# Altium PCB CH32F&Vx0xR-R1-1v2.PcbDoc (part 1 of 2)
Units mil, origin at the board's own origin, x right, y up, seen from the top; angles counter-clockwise.
Board outline 2913.39 x 3372 mil, 2 copper layers (Top Layer, Bottom Layer); 78 components, 107 nets, 422 pads, 593 vias.
Unrouted connection lines stored in the file: 10.
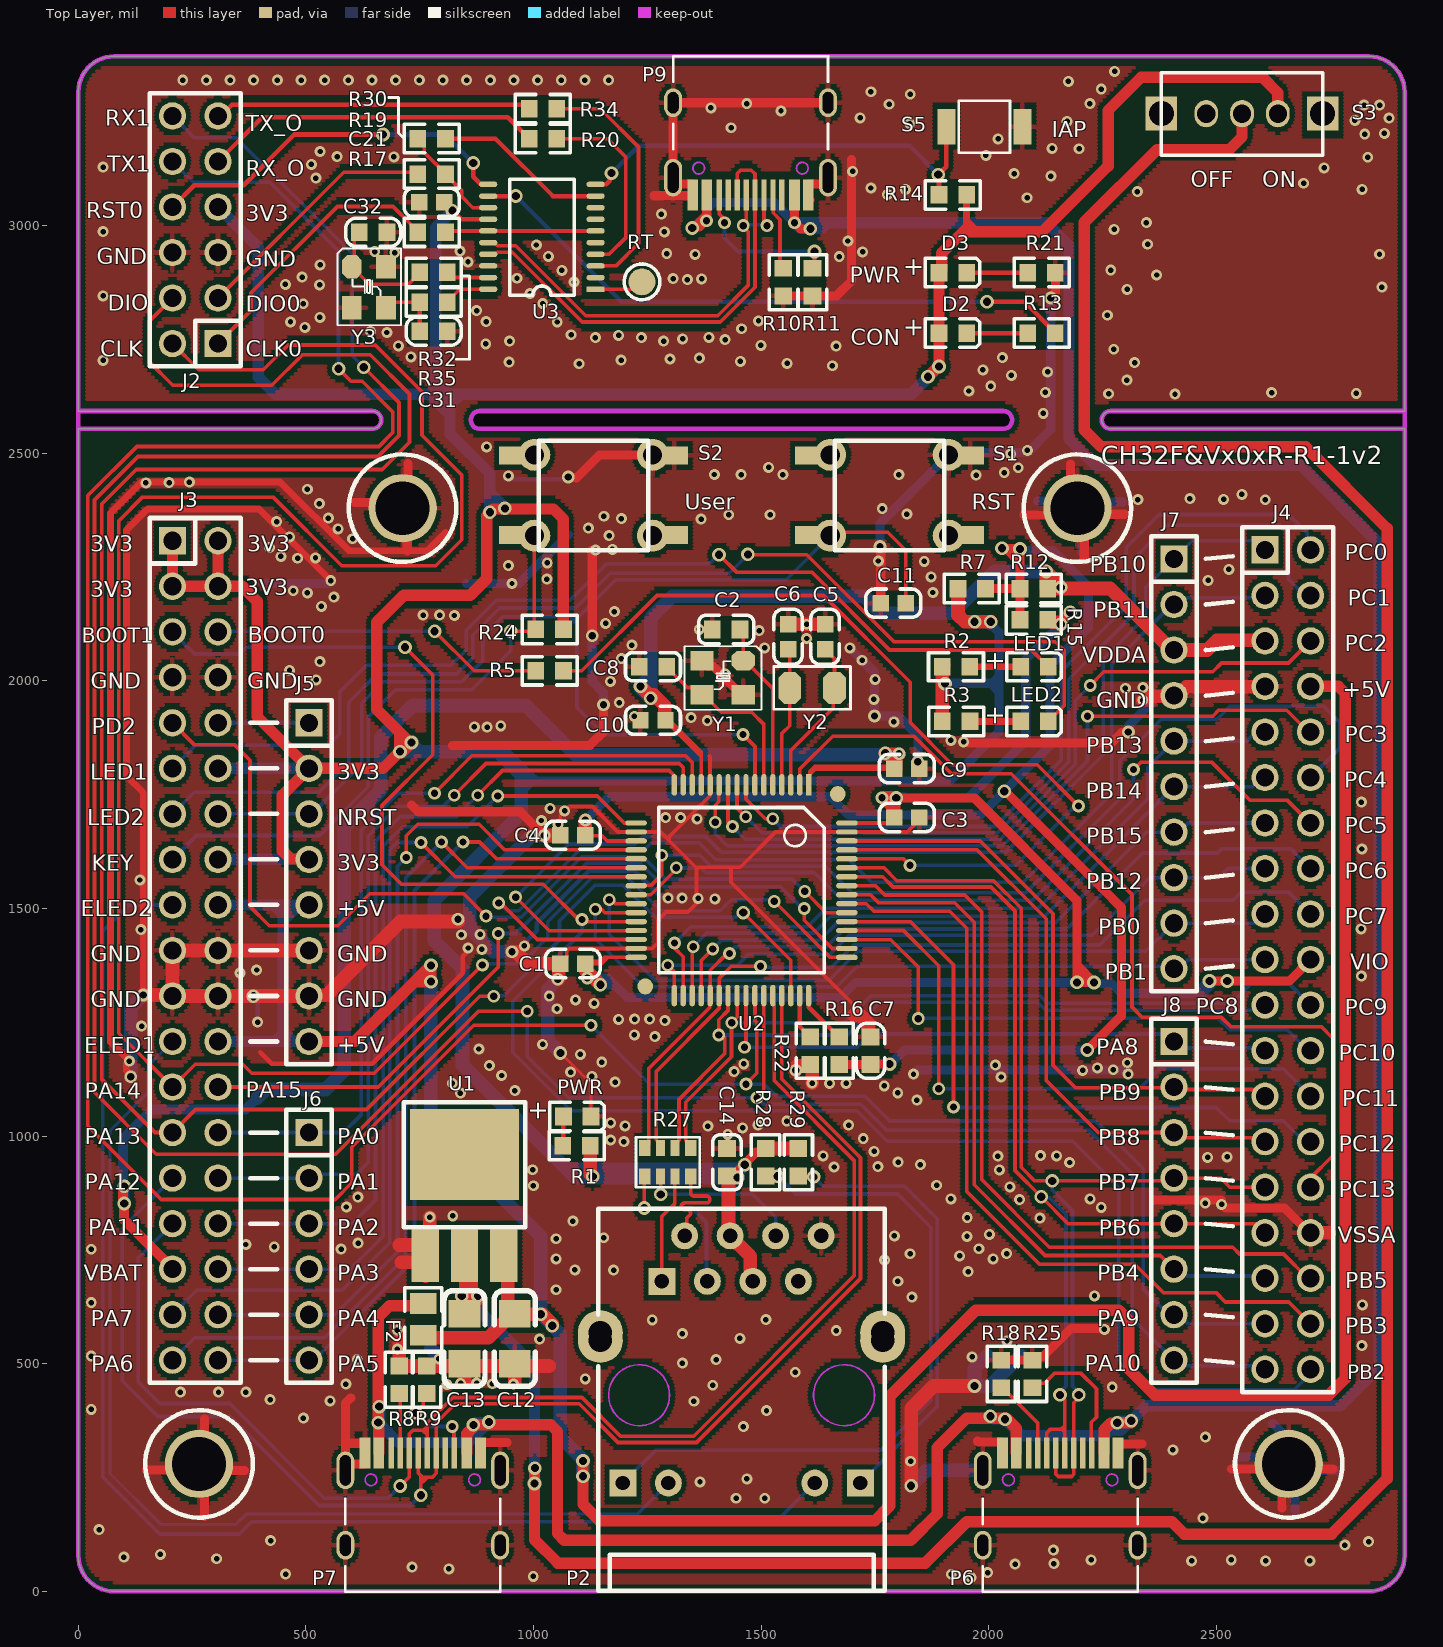
[diagram p0: Top Layer view]
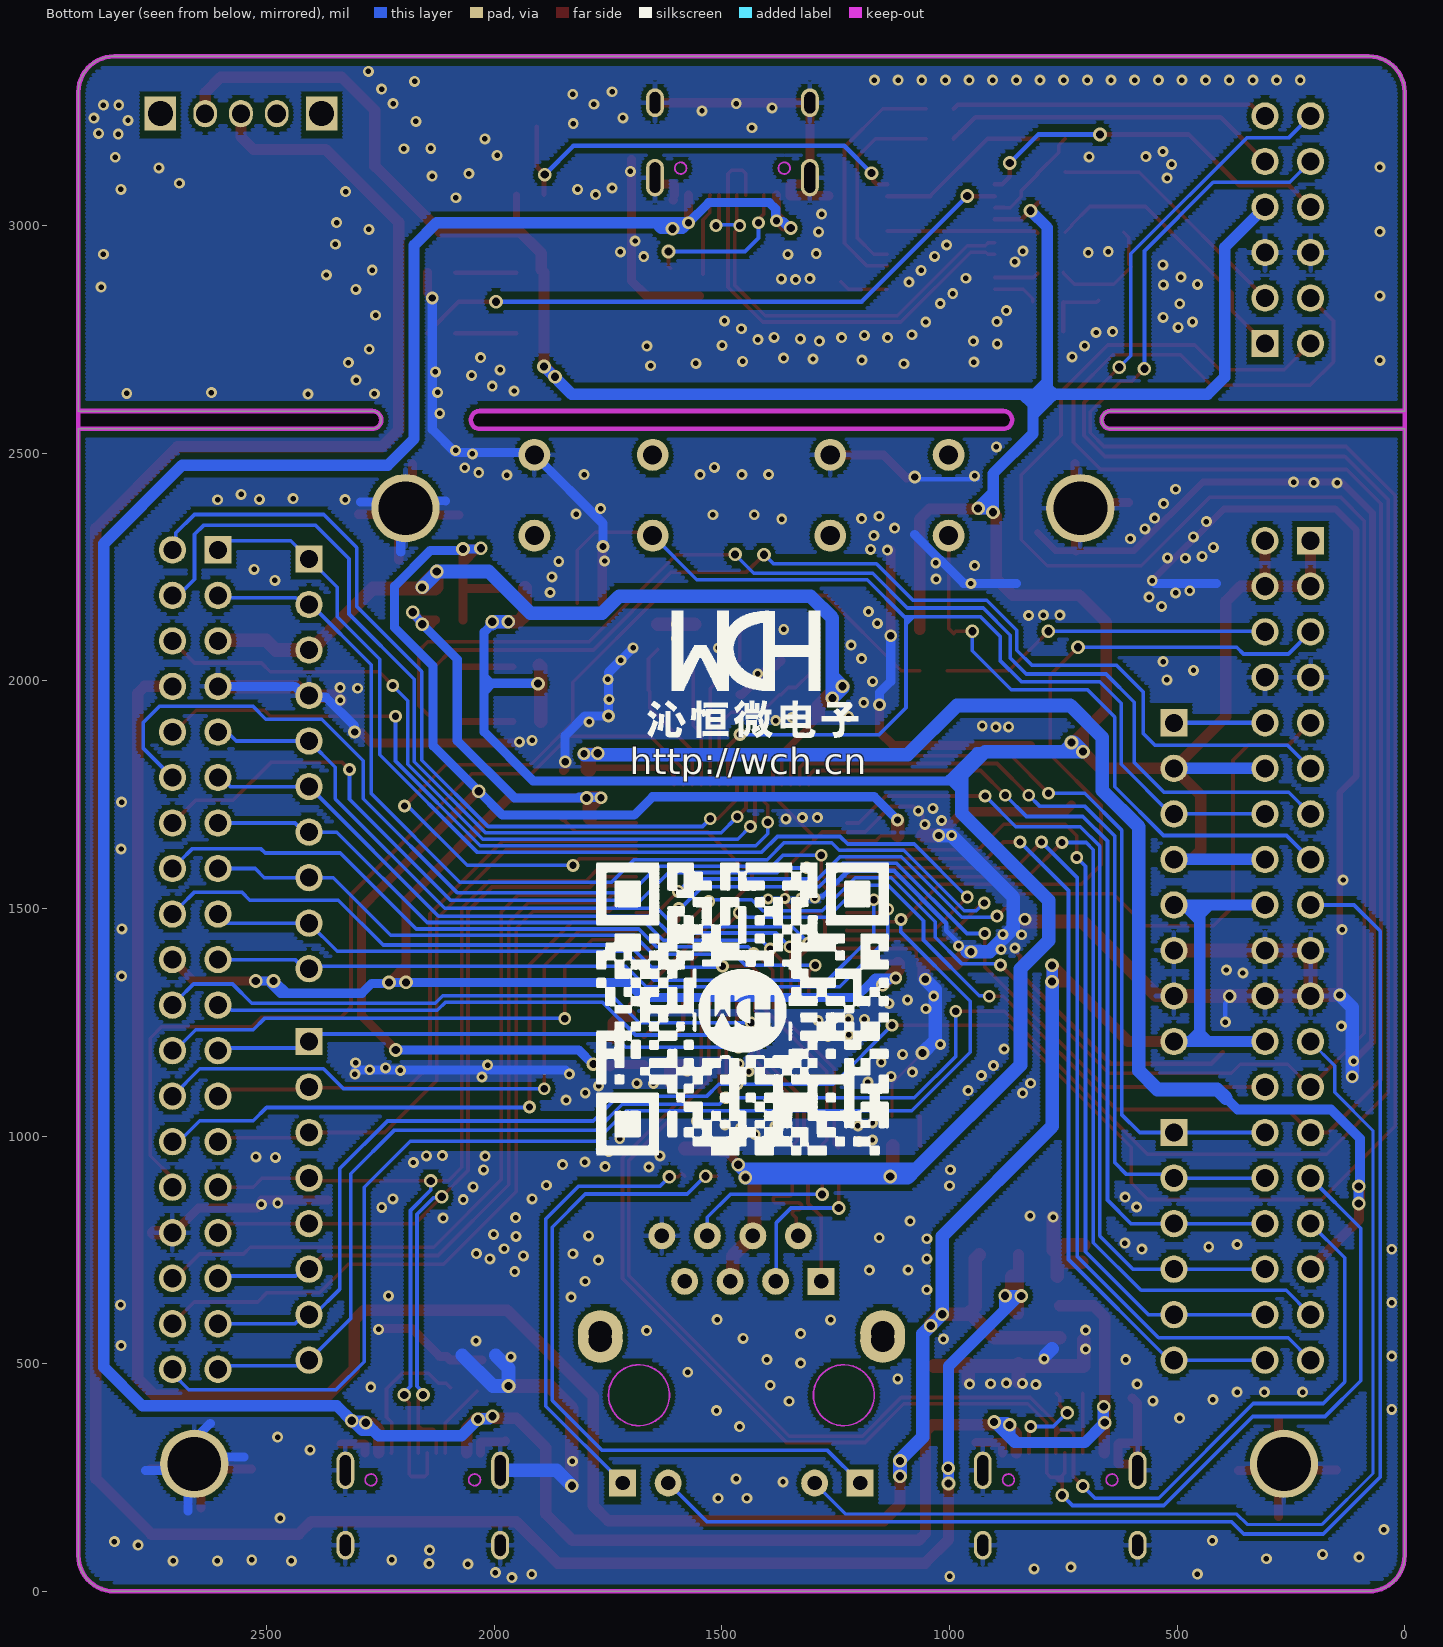
[diagram p1: Bottom Layer view, seen from below]

## Layer stack, top to bottom
Top Solder: solder mask 0.4, Solder Resist, Dk 3.5
Top Layer: signal copper 1.4
Dielectric 1: dielectric 12.6, FR-4, Dk 4.8
Bottom Layer: signal copper 1.4
Bottom Solder: solder mask 0.4, Solder Resist, Dk 3.5

## Board outline
0,78.74 ccw(c78.74,78.74) 78.74,0 2834.65,0 ccw(c2834.65,78.74) 2913.39,78.74 2913.39,2553.48 2267.72,2553.48 cw(c2267.72,2573.16) 2267.72,2592.85 2913.39,2592.85 2913.39,3293.26 ccw(c2834.65,3293.26) 2834.65,3372 78.74,3372 ccw(c78.74,3293.26) 0,3293.26 0,2592.85 645.67,2592.85 cw(c645.67,2573.16) 645.67,2553.48 0,2553.48
cut-out: 881.89,2553.48 cw(c881.89,2573.16) 881.89,2592.85 2031.5,2592.85 cw(c2031.5,2573.16) 2031.5,2553.48

## Design rules (kind name [scope] priority, off if disabled: settings)
Clearance Clearance_1 [InPolygon] p1: gap=10 ignorepadtopadclearanceinfootprint=FALSE
Clearance [All] p2: gap=6 ignorepadtopadclearanceinfootprint=FALSE except(7: Arc-Via Track-Via; 8: Via-Via)
ComponentClearance [All] p1 off: gap=10 collisioncheckmode=3 verticalgap=10 showdistances=FALSE
DiffPairsRouting [All] p1: maxlimit=10 minlimit=7 mostfreqgap=8 toplayer_minwidth=6 toplayer_maxwidth=15 toplayer_prefwidth=8 bottomlayer_minwidth=6 bottomlayer_maxwidth=15 bottomlayer_prefwidth=8 maxuncoupledlength=500
MinimumSolderMaskSliver [All] p1 off: minsoldermaskwidth=10
PolygonConnect PolygonConnect_1 [IsVia] p1: connectstyle=Direct reliefconductorwidth=10 reliefentries=4 polygonreliefangle="90 Angle" airgapwidth=10
PolygonConnect [All] p2: connectstyle=Relief reliefconductorwidth=10 reliefentries=4 polygonreliefangle="90 Angle" airgapwidth=10
RoutingVias [All] p1: holewidth=16 width=28 viastyle="Through Hole" minholewidth=12 minwidth=24 maxholewidth=28 maxwidth=50
SilkToSilkClearance [All] p1 off: silktosilkclearance=10
SilkToSolderMaskClearance [IsPad] p1 off: minsilkscreentomaskgap=10 clearancetoexposedcopper=TRUE
SolderMaskExpansion [All] p1: expansion=4 istentingtop=FALSE
Width [All] p1: maxlimit=100 minlimit=6 preferedwidth=10
25 further rules are at their usual default settings.

## Classes and differential pairs
component class CH32F&Vx0xR-R1-1v0: C1 C2 C3 C4 C5 C6 C7 C8 C9 C10 C11 C12 C13 C14 C21 C31 C32 D2 D3 F2 J2 J3 J4 J5 J6 J7 J8 LED1 LED2 P2 P6 P7 P9 PWR R1 R2 R3 R5 R7 R8 R9 R10 R11 R12 R13 R14 R15 R16 R17 R18 R19 R20 R21 R22 R24 R25 R27 R28 R29 R30 R32 R34 R35 RT S1 S2 S3 S5 U1 U2 U3 Y1 Y2 Y3

## Components (designator, comment, footprint, x,y, rotation, side; value= is the part's Value field where it differs from the comment)
C1 "0.1uF" 0603_C#1 1058.52,1379 r0 top
C2 "22pF" 0603_C#2 1392.68,2112.89 r0 top
C3 "0.1uF" 0603_C#1 1847.52,1700 r180 top
C4 "0.1uF" 0603_C#1 1058.52,1661 r0 top
C5 "12pF" 0603_C#1 1640.33,2069.42 r90 top
C6 "12pF" 0603_C#1 1559.01,2069.42 r90 top
C7 "0.1uF" 0603_C#3 1740.13,1217.85 r270 top
C8 "22pF" 0603_C#2 1231.92,2031.15 r0 top
C9 "0.1uF" 0603_C#1 1792.54,1807.24 r0 top
C10 "0.1uF" 0603_C#1 1289.73,1913.47 r180 top
C11 "0.1uF" 0603_C#1 1762.54,2170.72 r0 top
C12 "10uF" 3216_C 958.58,610.1 r90 top
C13 "10uF" 3216_C 848.22,610.1 r90 top
C14 "0.1uF" 0603_C#2 1424.79,972.85 r270 top
C21 "0.1uF" 0603_C#1 803.51,3051.15 r180 top
C31 "NC(22pF)" 0603_C#3 810.69,2768.11 r180 top
C32 "NC(22pF)" 0603_C#3 677.82,2985.39 r180 top
D2 "BLUE" 0603+ 1890.52,2764 r0 top
D3 "RED" 0603+ 1890.52,2897 r0 top
F2 "500mA" 0805 757.36,632.52 r270 top
J2 "Header 6X2" IDC12-2.54mm 306.69,2741 r180 top
J3 "Header 19X2" IDC38-2.54mm 206.69,2307.81 r0 top locked
J4 "Header 19X2" IDC38-2.54mm 2606.69,2287.81 r0 top locked
J5 "Header 8" SIP8-2.54mm 506.69,1907.81 r0 top locked
J6 "Header 6" SIP6-2.54MM 506.69,1007.81 r0 top locked
J7 "Header 10" SIP10-2.54mm 2406.69,2267.81 r0 top locked
J8 "Header 8" SIP8-2.54mm 2406.69,1207.81 r0 top locked
LED1 "LED1   blue" 0603+ 2069.89,2031 r0 top
LED2 "LED2  blue" 0603+ 2069.89,1911 r0 top
P2 "HR911105A" HR911105A 1281.69,680.9 r0 top
P6 "TYPE-C" TYPE-C-Receptacle-2.0 2156.81,304.01 r0 top
P7 "TYPE-C" TYPE-C-Receptacle-2.0 756.58,304.01 r0 top
P9 "TYPE-C" TYPE-C-Receptacle-2.0 1476.6,3067.24 r180 top
PWR "POWER  red" 0603+ 1065.53,1043.16 r0 top
R1 "1K" 0603 1064.15,978.99 r0 top
R2 "1K" 0603 1897.52,2031 r0 top
R3 "1K" 0603 1897.89,1911 r0 top
R5 "10K" 0603 1004.89,2022 r0 top
R7 "0Ω" 0603 1932.23,2202.87 r0 top
R8 "NC(5.1K)" 0603 704.84,495.16 r270 top
R9 "NC(5.1K)" 0603 764.87,495.16 r270 top
R10 "NC(5.1K)" 0603 1548.86,2906.21 r270 top
R11 "NC(5.1K)" 0603 1612.62,2906.21 r270 top
R12 "0Ω" 0603 2129.14,2202.87 r180 top
R13 "1K" 0603 2146.15,2764 r180 top
R14 "10K" 0603 1890.52,3067.51 r0 top
R15 "0Ω" 0603 2129.14,2133.98 r180 top
R16 "0" 0603 1671.27,1157.22 r90 top
R17 "100" 0603 745.7,2985.39 r0 top
R18 "NC(5.1K)" 0603 2027.31,507.88 r270 top
R19 "100" 0603 745.7,3113.33 r0 top
R20 "270" 0603 990.11,3191.22 r0 top
R21 "1K" 0603 2146.15,2897 r180 top
R22 "0" 0603 1607.71,1157.22 r90 top
R24 "10K" 0603 1004.89,2113 r0 top
R25 "NC(5.1K)" 0603 2095.87,507.88 r270 top
R27 "0Ω" 8P4R-0603 1294.71,942.54 r180 top
R28 "1K" 0603 1509.58,972.85 r270 top
R29 "1K" 0603 1581.64,972.85 r270 top
R30 "1K" 0603 745.7,3191.22 r0 top
R32 "NC(0R)" 0603 810.69,2897.19 r180 top
R34 "270" 0603 990.11,3257.07 r0 top
R35 "NC(0R)" 0603 810.69,2832.07 r180 top
RT "Testpoint" TESTPOINT1 1237.99,2876.56 r0 top
S1 "RESET(Yellow)" KEYX 1651.77,2319.23 r90 top locked
S2 "USER(Blue)" KEYX 1001.77,2319.23 r90 top locked
S3 "SW" SW1 2556.22,3246 r0 top
S5 "KEY" 贴片按键 1906.7,3217.42 r0 top
U1 "1117-3.3V" SOT-223 762.2,739.5 r0 top
U2 "CH32V307R" LQFP64M_10X10 1604.33,1771.55 r180 top
U3 "CH32V305F" TSSOP20 1136.27,2860.36 r90 top
Y1 "8MHz" XT3225 1460.4,2044.51 r180 top
Y2 "32.768k" FC-135 1661,1984.51 r180 top
Y3 "NC(12M)" XT3225 600.76,2909.96 r270 top
? "" HOLE 2194.72,2379.42 r0 top
? "" HOLE 712.29,2379.42 r0 top
? "" HOLE 2658.74,280.01 r90 top
? "" HOLE 265.2,280.01 r90 top

## Footprints (in the part's own frame and the unit in brackets; to place one, negate y for a bottom-side part, rotate by r counter-clockwise, add the part's x,y. Pads: shape width x height; smd on the part's side, far side on the other; paste and mask are expansions set on the pad)
8P4R-0603 [mm]
  rect 0.65x0.9 smd: 1(-1.28,-0.8) 4(1.28,-0.8) 5(1.28,0.8) 8(-1.28,0.8)
  rect 0.5x0.9 smd: 2(-0.4,-0.8) 3(0.4,-0.8) 6(0.4,0.8) 7(-0.4,0.8)
  silkscreen extent -1.78,-1.4 1.78,1.4, body extent -1.6,-0.8 1.6,0.8, height 0.6
0603 [mm]
  rect 0.93x0.98 smd: 1(0,0) 2(1.54,0)
  silkscreen extent -0.76,-0.79 2.3,0.79
0603+ [mm]
  rect 0.93x0.98 smd: 1(0,0) 2(1.54,0)
  silkscreen extent -0.76,-0.79 2.27,0.79
0603_C#1 [mil]
  rect 36x36 smd: 1(0,0) 2(55,0)
  silkscreen extent -33,-31 88,31
0603_C#2 [mil]
  rect 36.61x38.58 smd: 1(0,0) 2(60.63,0)
  silkscreen extent -30,-31 91,31
0603_C#3 [mil]
  rect 36.61x38.58 smd mask+2: 1(0,0) 2(60.63,0)
  silkscreen extent -30,-31 91,31
0805 [mm]
  rect 1.16x1.47 smd: 1(0,0) 2(1.78,0)
  silkscreen extent -0.88,-1.04 2.66,1.03
3216_C [mil]
  rect 60x70 smd: 1(0,0) 2(-110,0)
  silkscreen extent -160,-45 50,45
FC-135 [mil]
  oct 50x70 smd: 1(0,0) 2(98.43,0)
  silkscreen extent -35,-47 133,47
HOLE [mm]
  round 3.81 hole 3: 0(0,0)
  silkscreen extent -3,-3 3,3
HR911105A [mm]
  rect 1.5x1.5 hole 0.8: 1(0,0) 9(-2.175,-11.252) 12(11.075,-11.252)
  round 1.5 hole 0.8: 2(1.27,2.54) 3(2.54,0) 4(3.81,2.54) 5(5.08,0) 6(6.35,2.54) 7(7.62,0) 8(8.89,2.54) 10(0.365,-11.252) 11(8.535,-11.252)
  round 2.5 hole 1.3: ""(-3.43,-2.852) ""(-3.43,-3.3) ""(12.32,-3.3) ""(12.32,-2.852)
  Keep-Out Layer circle w0.1: c10.165,-6.352 r1.7
  Keep-Out Layer circle w0.1: c-1.265,-6.352 r1.7
  silkscreen extent -3.55,-17.27 12.45,4.06
IDC12-2.54mm [mil]
  rect 60x60 hole 40: 1(0,0)
  round 60 hole 40: 2(100,0) 3(0,-100) 4(100,-100) 5(0,-200) 6(100,-200) 7(0,-300) 8(100,-300) 9(0,-400) 10(100,-400) 11(0,-500) 12(100,-500)
  silkscreen extent -50,-550 150,50
IDC38-2.54mm [mil]
  rect 60x60 hole 40: 1(0,0)
  round 60 hole 40: 2(100,0) 3(0,-100) 4(100,-100) 5(0,-200) 6(100,-200) 7(0,-300) 8(100,-300) 9(0,-400) 10(100,-400) 11(0,-500) 12(100,-500) 13(0,-600) 14(100,-600) 15(0,-700) 16(100,-700) 17(0,-800) 18(100,-800) 19(0,-900) 20(100,-900) 21(0,-1000) 22(100,-1000) 23(0,-1100) 24(100,-1100) 25(0,-1200) 26(100,-1200) 27(0,-1300) 28(100,-1300) 29(0,-1400) 30(100,-1400) 31(0,-1500) 32(100,-1500) 33(0,-1600) 34(100,-1600) 35(0,-1700) 36(100,-1700) 37(0,-1800) 38(100,-1800)
  silkscreen extent -50,-1850 150,50
KEYX [mil]
  round 70 hole 42: 1(0,0) 2(0,-259.84) 3(177.17,-259.84) 4(177.17,0)
  silkscreen extent -32,-250 208,-10
LQFP64M_10X10 [mm]
  round 0.889 smd: 0(-1.619,0.508) 0(9.119,11.246)
  rect 0.3x1.2 smd: 1(0,0)
  oval 0.3x1.2 smd: 2(0.5,0) 3(1,0) 4(1.5,0) 5(2,0) 6(2.5,0) 7(3,0) 8(3.5,0) 9(4,0) 10(4.5,0) 11(5,0) 12(5.5,0) 13(6,0) 14(6.5,0) 15(7,0) 16(7.5,0) 33(7.5,11.754) 34(7,11.754) 35(6.5,11.754) 36(6,11.754) 37(5.5,11.754) 38(5,11.754) 39(4.5,11.754) 40(4,11.754) 41(3.5,11.754) 42(3,11.754) 43(2.5,11.754) 44(2,11.754) 45(1.5,11.754) 46(1,11.754) 47(0.5,11.754) 48(0,11.754)
  oval 1.2x0.3 smd: 17(9.627,2.127) 18(9.627,2.627) 19(9.627,3.127) 20(9.627,3.627) 21(9.627,4.127) 22(9.627,4.627) 23(9.627,5.127) 24(9.627,5.627) 25(9.627,6.127) 26(9.627,6.627) 27(9.627,7.127) 28(9.627,7.627) 29(9.627,8.127) 30(9.627,8.627) 31(9.627,9.127) 32(9.627,9.627) 49(-2.127,9.627) 50(-2.127,9.127) 51(-2.127,8.627) 52(-2.127,8.127) 53(-2.127,7.627) 54(-2.127,7.127) 55(-2.127,6.627) 56(-2.127,6.127) 57(-2.127,5.627) 58(-2.127,5.127) 59(-2.127,4.627) 60(-2.127,4.127) 61(-2.127,3.627) 62(-2.127,3.127) 63(-2.127,2.627) 64(-2.127,2.127)
  silkscreen extent -0.86,1.26 8.37,10.49
SIP6-2.54MM [mil]
  rect 60x60 hole 40: 1(0,0)
  round 60 hole 40: 2(0,-100) 3(0,-200) 4(0,-300) 5(0,-400) 6(0,-500)
  silkscreen extent -50,-550 50,50
SIP8-2.54mm [mil]
  rect 60x60 hole 40: 1(0,0)
  round 60 hole 40: 2(0,-100) 3(0,-200) 4(0,-300) 5(0,-400) 6(0,-500) 7(0,-600) 8(0,-700)
  silkscreen extent -50,-750 50,50
SIP10-2.54mm [mil]
  rect 60x60 hole 40: 1(0,0)
  round 60 hole 40: 2(0,-100) 3(0,-200) 4(0,-300) 5(0,-400) 6(0,-500) 7(0,-600) 8(0,-700) 9(0,-800) 10(0,-900)
  silkscreen extent -50,-950 50,50
SOT-223 [mil]
  rect 60x120 smd: 1(0,0) 2(86,0) 3(172,0)
  rect 240x200 smd: ""(86,220)
  silkscreen extent -47,60 219,335
SW1 [mm]
  rect 1.75x1.9 hole 1.4: 0(-4.5,0) 0(4.5,0)
  oval 1.321x1.524 hole 1.016: 1(0,0) 2(-2,0) 3(2,0)
  silkscreen extent -4.51,-2.31 4.5,2.29
TESTPOINT1 [mm]
  round 1.5 smd: 1(0,0)
  silkscreen extent -1,-1 1,1
TSSOP20 [mil]
  rect 12x40 smd: 1(0,0)
  oval 12x40 smd: 2(25.6,0) 3(51.2,0) 4(76.8,0) 5(102.4,0) 6(128,0) 7(153.5,0) 8(179.1,0) 9(204.7,0) 10(230.3,0) 11(230.3,236) 12(204.7,236) 13(179.1,236) 14(153.5,236) 15(128,236) 16(102.4,236) 17(76.8,236) 18(51.2,236) 19(25.6,236) 20(0,236)
  silkscreen extent -13,47 242,189
TYPE-C-Receptacle-2.0 [mm]
  oval 1x1.6 hole 0.6 slot 1.2 at 90 deg: 0(-4.32,-5.15) 0(4.32,-5.15)
  oval 1x2.1 hole 0.6 slot 1.7 at 90 deg: 0(-4.32,-0.97) 0(4.32,-0.97)
  rect 0.6x1.75 smd: A1(-3.225,0) A4(-2.45,0) B1(3.225,0) B4(2.45,0)
  rect 0.3x1.75 smd: A5(-1.25,0) A6(-0.25,0) A7(0.25,0) A8(1.25,0) B5(1.75,0) B6(0.75,0) B7(-0.75,0) B8(-1.75,0)
  Keep-Out Layer circle w0.1: c-2.89,-1.5 r0.325
  Keep-Out Layer circle w0.1: c2.89,-1.5 r0.325
  silkscreen extent -4.32,-7.75 4.32,-2.55
XT3225 [mm]
  oct 1.3x1.1 smd: 1(0,0)
  rect 1.3x1.1 smd: 2(2.3,0) 3(2.3,1.9) 4(0,1.9)
  silkscreen extent -1.02,-0.8 3.27,2.74
贴片按键 [mm]
  rect 1x2 smd: 1(0,0) 2(4.242,0)
  silkscreen extent 0.69,-1.45 3.55,1.45

## Part data
C1 C3 C4 C5 C6 C7 C9 C10 C11 C21 C31 C32: library part Cap, "Capacitor"
  C31 C32: LatestRevisionDate=17-Jul-2002, LatestRevisionNote="Re-released for DXP Platform.", PackageReference=RAD-0.3, Published=8-Jun-2000, Publisher="Altium Limited"
C2 C8 C12 C13 C14: library part CAP, "Capacitor"
D2 D3: library part D0603, "Typical RED, GREEN, YELLOW, AMBER GaAs LED", LatestRevisionDate=17-Jul-2002, LatestRevisionNote="Re-released for DXP Platform.", PackageDescription="SM LED; 2 Flat Leads", PackageReference=3.2X1.6X1.1, PackageVersion=Feb-2002, Published=8-Jun-2000, Publisher="Altium Limited"
F2: library part FUSE1, "Fuse"
J2: "Header, 6-Pin, Dual row", LatestRevisionDate=17-Jul-2002, LatestRevisionNote="Re-released for DXP Platform.", Publisher="Altium Limited"
J3 J4: "Header, 19-Pin, Dual row", LatestRevisionDate=17-Jul-2002, LatestRevisionNote="Re-released for DXP Platform.", Publisher="Altium Limited"
J5 J8: "Header, 8-Pin", LatestRevisionDate=17-Jul-2002, LatestRevisionNote="Re-released for DXP Platform.", Publisher="Altium Limited"
J6: "Header, 6-Pin", LatestRevisionDate=17-Jul-2002, LatestRevisionNote="Re-released for DXP Platform.", Publisher="Altium Limited"
J7: "Header, 10-Pin", LatestRevisionDate=17-Jul-2002, LatestRevisionNote="Re-released for DXP Platform.", Publisher="Altium Limited"
LED1 LED2 PWR: library part LED0, "Typical INFRARED GaAs LED", LatestRevisionDate=08-Jul-2005, LatestRevisionNote="Mech Layer 1 removed.", PackageReference=LED-0, Published=8-Jun-2000, Publisher="Altium Limited"
P6 P7 P9: library part TYPE-C1
R1 R2 R3: library part "Res Semi", "Semiconductor Resistor"
R5 R7 R8 R9 R10 R11 R12 R15 R18 R24 R25: library part Res2, "Resistor"
R13 R14 R16 R17 R19 R20 R21 R22 R30 R32 R34 R35: library part R0603, "Resistor", LatestRevisionDate=17-Jul-2002, LatestRevisionNote="Re-released for DXP Platform.", PackageDescription="Axial Device, Thru-Hole; 2 Leads; 0.3 in Pin Spacing", PackageReference=AXIAL-0.3, Published=8-Jun-2000, Publisher="Altium Limited"
R27: library part R-8P4R, "贴片网络排阻", BOM名称=贴片网络排阻, 学习资源=www.ooocke.com, 版权归属=源创客
R28 R29: library part RES
RT: "测试点"
S1 S2: library part "SW PUSHBUTTON", "SE PUSHBUTTON"
U2: "RISC-V FPU HD-MCU, 144MHz, USB_480M, USB OTG, 1000M Ethernet MAC, 2*CAN"
U3: "RISC-V FPU HD-MCU, 144MHz, USB_480M, CAN, UART*2, SPI"
Y1 Y2 Y3: library part XTAL, "Crystal Oscillator"
  Y1: LatestRevisionDate=17-Jul-2002, LatestRevisionNote="Re-released for DXP Platform.", PackageDescription="Crystal, Thru-Hole; 2 Leads; Body 3.1 x 8.2 mm (Dia.xH)", PackageReference=R38, Published=8-Jun-2000, Publisher="Altium Limited"
  Y2: LatestRevisionDate=17-Jul-2002, LatestRevisionNote="Re-released for DXP Platform.", PackageReference=R38, Published=8-Jun-2000, Publisher="Altium Limited"

## Free pads (board coordinates)
  rect 60x40 smd mask+4: ""(954.53,2320.31) ""(954.53,2495.31) ""(1308.86,2320.31) ""(1308.86,2495.31) ""(1604.53,2320.31) ""(1604.53,2495.31) ""(1958.86,2320.31) ""(1958.86,2495.31)

## Via types
v1: diameter 24, hole 12, Top Layer to Bottom Layer, tented both sides, 437 vias
v2: diameter 30, hole 18, Top Layer to Bottom Layer, tented both sides, 83 vias
v3: diameter 28, hole 16, Top Layer to Bottom Layer, tented both sides, 73 vias

## Nets (pads, with @x,y where several pads share a name; then routed paths per layer and width w, separated by ;. In a path a pad name is that pad's centre, name@x,y a point inside that pad or via, vN(x,y) a via of type N, cw(c..) or ccw(c..) an arc to the next point about the centre after c; other vN are vias at no path point)
5V_in: F2.1 P6.A4 P6.B4 P7.A4 P7.B4 P9.A4 P9.B4 | length 7931.5
  Top Layer w20: v2@1345.63,2991.56 v2@1348.86,2994.79 ; v2(1348.49,2994.79) v2@1348.86,2994.79 ; P9.B4@1380.14,3067.24 P9.B4@1380.14,3067.24 v3@1380.08,3024.15 ; 1380.93,3024.99 v3@1380.08,3024.15 ; P9.A4@1573.06,3067.24 1573.06,3006.84 1586.87,2993.03 v2(1608.1,2993.03) ; v2@1348.86,2994.79 1350.72,2994.79 v2@1352.64,2996.7 ; v2@1348.86,2994.79 1350.77,2996.7 v2@1352.64,2996.7 ; v2@1352.64,2996.7 v3@1380.08,3024.15 ; v2@1352.64,2996.7 1363.99,2996.7 1377.85,3010.57 v3(1380.02,3010.57) 1380.08,3010.63 v3@1380.08,3024.15
  Top Layer w25: v2(658.83,370.62) 658.83,602.79 683.56,627.52 F2.1@757.36,627.52 ; P7.A4@660.12,304.01 v2@660.12,356.25 ; P7.B4@853.03,304.01 853.23,304.21 853.23,346.12 866.84,359.72 866.84,363.36 869.15,365.67 1037.94,365.67 1052.59,351.02 1052.59,127.04 1067.23,112.39 1828.54,112.39 1886.29,170.14 1886.29,315.44 1951.35,380.5 v2@2035.52,380.5 ; v2@2038.11,380.5 2060.35,358.25 P6.A4@2060.35,304.01 ; P6.B4@2253.27,304.01 2253.47,304.21 2253.47,355.07 2267.69,369.3 2281.22,369.3 v2(2282.17,370.25) v2@2312.78,370.25 ; v2(2312.78,374.85) v2@2314.14,374.85
  Bottom Layer w20: v2(1348.49,2994.79) 1351.19,2994.79 1365.45,3009.04 ; v3(1380.02,3010.57) 1381.55,3012.1 1381.55,3036.67 1395.53,3050.65 1528.99,3050.65 v3(1573.05,3006.59)
  Bottom Layer w25: v2(658.83,370.62) v2@662.08,367.37 ; v2(661.13,405.74) 662.08,404.78 v2@662.08,367.37 ; v2(867.79,365.67) v2@866.84,364.71 ; v2(901.71,371.88) v2@900.76,370.93 ; v2@1608.1,2991.68 v2@1605.79,2993.99 ; 1656.45,3006.59 1645.68,3006.59 ; v2(2003.48,384.53) 2004.84,384.53 2010.44,378.92 2034.57,378.92 v2(2035.52,377.96) 2071.8,341.69 2253.61,341.69 2265.48,353.56 ; v2@662.08,367.37 702.34,327.11 852.19,327.11 ; 852.19,327.11 856.94,327.11 v2@900.76,370.93 ; 852.19,327.11 866.84,341.76 v2@866.84,364.71 ; v2@866.84,364.71 868.19,364.71 874.41,370.93 v2@900.76,370.93 ; v3@1573.87,3006.59 v3@1574.44,3006.02 ; v3@1573.87,3006.59 1645.68,3006.59 ; v3@1573.87,3006.59 v3(1573.05,3006.59) 1573.63,3006.02 v3@1574.44,3006.02 ; v3@1574.44,3006.02 1586.47,2993.99 v2@1605.79,2993.99 ; v3@1574.44,3006.02 1593.76,3006.02 1604.24,2995.53 v2@1605.79,2993.99 ; v2@1605.79,2993.99 1607.14,2993.99 v2(1608.1,2993.03) 1609.05,2993.99 1633.08,2993.99 1645.68,3006.59 ; 1645.68,3006.59 2125.98,3006.59 2176,2956.58 2176,2531.42 2233.52,2473.9 2685.2,2473.9 2857.75,2301.35 2857.75,492.64 2772.58,407.46 2345.4,407.46 v2(2312.78,374.85) 2311.83,373.9 v2@2310.47,373.9 ; 2265.48,353.56 2290.14,353.56 v2@2310.47,373.9 ; 2265.48,353.56 v2(2282.17,370.25) 2283.53,370.25 2287.17,373.9 v2@2310.47,373.9
+5V: C12.1 F2.2 J3.18 J3.24 J4.8 J5.5 J5.8 U1.3 | length 6806.1
  Top Layer w25: J5.8@506.69,1207.81 607.33,1207.81 738.02,1338.49 ; v2@773.42,1339.45 773.97,1340 v2@773.97,1374.45 ; v2(774.52,1339.45) 773.56,1338.49 738.02,1338.49 ; v2(774.52,1375) v2@773.97,1374.45 ; v2(1108.45,286.63) v2(1108.45,252.96) 1108.45,191.35 1144.33,155.48 1749.92,155.48 1782.35,187.9 1782.35,428.64 1971.33,617.62 2285.4,617.62 2307.16,595.86 2307.16,488.43 2364.55,431.04 2746.83,431.04 2782.66,466.87 2782.66,1973.16 2768.01,1987.81 J4.8@2706.69,1987.81 ; 738.02,1338.49 v2@773.97,1374.45
  Top Layer w30: F2.2@757.36,557.44 757.94,556.86 900.34,556.86 953.58,610.1 C12.1@958.08,610.1 ; U1.3@934.2,739.5 943.08,730.62 943.08,625.1 C12.1@958.08,610.1 ; v2(1040.89,583.53) 1040.89,587.84 1019.9,608.83 v2(1015.59,608.83) 959.86,608.83 C12.1@958.58,610.1 C12.1@958.08,610.1
  Bottom Layer w25: J3.24@306.69,1207.81 431.98,1207.81 ; J3.18@306.69,1507.81 428.44,1507.81 ; J5.8@506.69,1207.81 471.55,1207.81 ; J5.5@506.69,1507.81 J5.5@484.23,1507.81 ; v2@774.37,1340.41 v2@774.37,1375 ; 428.44,1507.81 456.34,1507.81 ; 428.44,1507.81 449.67,1486.57 ; 431.98,1207.81 471.55,1207.81 ; 431.98,1207.81 449.67,1225.5 449.67,1229.68 ; 449.67,1229.68 449.67,1473.25 ; 449.67,1229.68 471.55,1207.81 ; 449.67,1473.25 449.67,1486.57 ; 449.67,1473.25 J5.5@484.23,1507.81 ; 449.67,1486.57 449.67,1501.15 456.34,1507.81 ; 456.34,1507.81 J5.5@484.23,1507.81
  Bottom Layer w30: v2@774.37,1340.41 774.37,1021.45 1015.59,780.23 v2(1015.59,608.83) v2(1040.89,583.53) 1058.44,565.98 1058.44,338.94 v2@1108.45,288.93 ; v2(1108.45,252.96) v2(1108.45,286.63)
BOOT0: R5.2 U2.60 | length 2012.6
  Top Layer w8: R5.2@1065.52,2022 1105.52,2022 1271.02,2187.5 1636.64,2187.5 1827.24,1996.89 1827.24,1908.38 1919.91,1815.72 2106.6,1815.72 v3(2197.18,1725.14) ; U2.60@1688.07,1609.07 1812.49,1609.07 v3(1826.84,1594.71)
  Bottom Layer w8: v3(1826.84,1594.71) 2059.2,1594.71 2189.63,1725.14 v3(2197.18,1725.14)
BOOT1: J3.5 J4.38 U2.28 | length 4359.4
  Top Layer w8: v2(717.58,2074.02) 778.6,2013.01 778.6,1837.83 666.98,1726.21 666.98,1595.99 709.66,1553.31 1021.07,1553.31 1103.1,1471.27 U2.28@1225.32,1471.27
  Bottom Layer w8: J3.5@206.69,2107.81 255.32,2059.18 353.8,2059.18 368.64,2074.02 v2(717.58,2074.02) ; v3(1106.52,1476) 1106.52,1448.41 954.27,1296.17 954.27,1184.23 1082.49,1056.01 1709.83,1056.01 1777.01,988.83 2184.35,988.83 2285.57,887.6 2285.57,504.62 2347.36,442.84 2670.82,442.84 2706.69,478.71 J4.38@2706.69,487.81
CLK: J2.2 J3.25 U2.49 | length 4956.6
  Top Layer w8: J2.2@206.69,2741 264.31,2683.39 406.4,2683.39 460.9,2737.9 651.96,2737.9 754.72,2635.13 754.72,2539.63 842.06,2452.3 842.06,2309.92 785.25,2253.11 578.34,2253.11 427.75,2403.71 140.94,2403.71 88.61,2351.37 88.61,1225.9 J3.25@206.69,1107.81 256.54,1157.65 361.22,1157.65 380.69,1138.18 649.7,1138.18 v3(887.52,1376) ; v3(1528.82,1515.64) 1651.92,1392.53 U2.49@1688.07,1392.53
  Bottom Layer w8: v3(887.52,1376) 887.52,1377.2 885.72,1379 973.19,1379 1031.27,1437.08 1031.27,1471.02 1127.8,1567.55 1206.85,1567.55 1279.17,1495.23 1409.92,1495.23 1434.06,1519.37 1525.09,1519.37 v3(1528.82,1515.64)
CLK0: J2.1 R17.1 | length 611.2
  Top Layer w8: J2.1@306.69,2741 379.33,2813.64 379.33,2852.44 569.05,3042.15 691.05,3042.15 731.4,3001.81 731.4,2999.69 R17.1@745.7,2985.39
D_SWCLK: R17.2 U3.6 U3.15 | length 331.8
  Top Layer w8: R17.2@806.33,2983.96 810.74,2988.36 U3.15@900.27,2988.36 U3.6@1136.27,2988.36
D_SWDIO: R19.2 R30.1 U3.13 | length 256.8
  Top Layer w8: R30.1@745.7,3191.22 760.01,3176.91 760.01,3160.64 806.33,3114.32 R19.2@806.33,3113.33 806.33,3112.35 842.54,3076.14 842.54,3063.2 866.28,3039.46 U3.13@900.27,3039.46 899.5,3040.23 879.44,3040.23
DIO: J2.4 J3.27 U2.46 | length 4885.5
  Top Layer w8: J2.4@206.69,2841 156.14,2790.45 156.14,2700.73 207.64,2649.24 425.07,2649.24 492.38,2716.55 641.03,2716.55 727.26,2630.32 727.26,2524.33 667.36,2464.42 126.95,2464.42 51.76,2389.23 51.76,1124.21 168.17,1007.81 J3.27@206.69,1007.81 257.38,1058.5 632.94,1058.5 881.77,1307.33 v3(912.63,1307.33) ; v2(1460.57,1490.94) 1564.96,1386.55 U2.46@1564.96,1308.79
  Bottom Layer w8: v3(912.63,1307.33) 913.59,1308.29 934.63,1308.29 1056.96,1430.62 1056.96,1473.06 1134.97,1551.07 1196.59,1551.07 1267.09,1480.57 1444.24,1480.57 1454.61,1490.94 v2(1460.57,1490.94)
DIO0: J2.3 R19.1 | length 553.9
  Top Layer w8: J2.3@306.69,2841 583.23,3117.53 744.9,3117.53 R19.1@745.7,3118.33
ELED1: J3.23 P2.10 | length 2316.4
  Bottom Layer w7: J3.23@206.69,1207.81 153.71,1154.82 153.71,1096.4 69.46,1012.16 69.46,258.78 181.17,147.07 345.99,147.07 368.54,169.63 1227.78,169.63 P2.10@1296.06,237.91
ELED2: J3.17 P2.11 | length 3038.4
  Bottom Layer w8: J3.17@206.69,1507.81 111.01,1507.81 53.62,1450.42 53.62,251.12 178.76,125.98 353.34,125.98 380.2,152.84 1532.65,152.84 P2.11@1617.72,237.91
ERXN: J4.18 R27.3 U2.38 | length 1824.1
  Top Layer w8: R27.3@1278.96,974.03 1278.96,981.91 1273.12,987.75 1272.65,987.75 1269.14,991.27 1269.14,1142.02 1407.48,1280.36 1407.48,1346.26 1434.22,1373 v3(1498.52,1373)
  Bottom Layer w8: v3(1498.52,1373) 1498.52,1372.1 1499.9,1370.72 1654.22,1370.72 1703.37,1419.87 2243.91,1419.87 2342.3,1518.25 2536.84,1518.25 2554.66,1536.08 2658.43,1536.08 2689.71,1504.79 J4.18@2703.68,1504.79
ERXN1: P2.6 R27.6 | length 353.2
  Top Layer w8: R27.6@1278.96,911.04 1278.96,872.56 v2(1279.52,872)
  Bottom Layer w8: v2(1279.52,872) 1481.55,872 1531.69,821.86 P2.6@1531.69,780.9
ERXP: J4.16 R27.4 U2.37 | length 1888.7
  Top Layer w8: R27.4@1244.31,974.03 1253.11,982.83 1253.11,1148.62 1387.07,1282.58 1387.07,1308.06 U2.37@1387.8,1308.79 1387.8,1364.26 1424.67,1401.13 v3(1430.17,1401.13)
  Bottom Layer w8: v3(1430.17,1401.13) 1430.17,1404.35 1441.64,1415.81 1643.28,1415.81 1682.59,1455.12 2171.36,1455.12 2338.05,1621.81 2502.93,1621.81 2512.01,1630.88 2663.62,1630.88 2689.71,1604.79 J4.16@2703.68,1604.79
ERXP1: P2.3 R27.5 | length 349.4
  Top Layer w8: v2(1243.11,842.19) 1243.11,909.84 R27.5@1244.31,911.04
  Bottom Layer w8: v2(1243.11,842.19) 1347.83,842.19 1379.97,810.05 1379.97,682.63 P2.3@1381.69,680.9
ETXN: J4.22 R27.1 U2.40 | length 1712.5
  Top Layer w8: R27.1@1345.1,974.03 1345.1,978.96 1334.44,989.62 1334.44,1074.28 1434.65,1174.49 1434.65,1205.14 1434.65,1248.13 v3(1435.52,1249) 1447.58,1261.06 1447.58,1308.06 U2.40@1446.85,1308.79
  Bottom Layer w8: v3(1435.52,1249) 1681.47,1249 1740.94,1308.47 2112.64,1308.47 2129.12,1291.99 2532.33,1291.99 2574.58,1334.24 2660.26,1334.24 2695.05,1299.45 J4.22@2698.34,1299.45
ETXN1: P2.2 R27.8 | length 241.9
  Top Layer w8: P2.2@1331.69,780.9 1336.31,785.51 1336.31,820.32 1342.8,826.81 1345.1,829.11 1345.1,830.81 ccw(c1337.6,830.81) 1337.6,838.31 1331.96,838.31 cw(c1331.96,845.81) 1331.96,853.31 1379.74,853.31 ccw(c1379.74,860.81) 1379.74,868.31 1352.6,868.31 cw(c1352.6,875.81) 1345.1,875.81 1345.1,898.77 R27.8@1345.1,911.04
ETXP: J4.21 R27.2 U2.39 | length 1639.5
  Top Layer w8: R27.2@1310.46,974.03 1310.46,981.91 1319.39,990.84 1319.39,1080.51 1419.6,1180.72 1419.6,1216.92 1416.09,1220.44 1404.15,1220.44 1405.72,1222 v3(1406.52,1222) 1406.52,1255.36 1427.17,1276 U2.39@1427.17,1308.79
  Bottom Layer w8: v3(1406.52,1222) 1689.62,1222 1761.82,1294.2 2107.11,1294.2 2124.87,1276.44 2576.01,1276.44 2577.42,1277.86 2582.67,1277.86 J4.21@2598.34,1293.52
ETXP1: P2.1 R27.7 | length 242.1
  Top Layer w8: P2.1@1281.69,680.9 1281.69,823.42 1310.46,852.18 R27.7@1310.46,911.04
GND: ?.0 C1.1 C2.1 C3.1 C4.1 C5.2 C6.2 C7.1 C8.1 C9.2 C10.2 C11.1 C12.2 C13.2 C14.1 C21.2 C31.1 C32.1 J2.5 J2.6 J3.7 J3.8 J3.19 J3.20 J3.21 J3.22 J4.7 J4.32 J5.6 J5.7 J7.4 P2.8 P6.0 P6.A1 P6.B1 P7.0 P7.A1 P7.B1 P9.0 P9.A1 P9.B1 pad.@1308.86,2495.31 pad.@1958.86,2495.31 PWR.2 R8.1 R9.1 R10.2 R11.2 R18.1 R21.1 R22.1 R25.1 S1.3 S2.3 S5.2 U1.1 U2.12 U2.18 U2.31 U2.63 U3.18 Y1.2 Y1.4 Y3.2 Y3.4 | length 20196.3
  Top Layer w6: v2(1058.93,1182.55) 1126.16,1115.32 PWR.2@1126.16,1043.16
  Top Layer w8: C4.1@1057.95,1660.43 C4.1@1058.52,1661 1058.52,1704.55 1077.97,1724 1129.2,1724 1185.08,1668.12 U2.18@1225.32,1668.12 1278.73,1668.12 1298.12,1648.73 ; C1.1@1058.52,1379 1072.52,1393 1072.52,1406.58 1078.16,1412.22 U2.31@1225.32,1412.22 1260.83,1412.22 1273.27,1424.65 1273.27,1474.59 1290.89,1492.21 1338.89,1492.21 1357.71,1511.04 1357.71,1589.14 1356.07,1590.79 ; U2.12@1387.8,1771.55 1387.07,1770.82 1387.07,1746.91 1298.12,1657.97 1298.12,1648.73 ; 1703.63,1265.46 1701.84,1267.25 1701.84,1289.46 1433.55,1557.75 1433.55,1590.79 ; C3.1@1847.52,1695 1820.65,1668.12 U2.63@1688.07,1668.12 1531.34,1668.12 1454,1590.79 1433.55,1590.79 ; 1298.12,1648.73 1356.07,1590.79 ; 1356.07,1590.79 1433.55,1590.79
  Top Layer w9: 1386.11,1835 1387.8,1833.32 U2.12@1387.8,1771.55
  Top Layer w10: 399.32,1184.31 424.71,1158.92 645.89,1158.92 844.78,1357.81 844.78,1395.49 856.03,1406.74 v1@856.03,1409.21
  Top Layer w15: v1@105.25,1159.24 105.25,1144.04 114.92,1134.37 v3(114.92,1130.22) ; v1(111.92,1164.96) 70.49,1206.39 70.49,2368.92 138.39,2436.82 443.15,2436.82 594.04,2285.94 722.42,2285.94 766.63,2285.94 806.57,2325.87 ; v3(142.53,1310.07) 142.53,1754.37 106.11,1790.79 106.11,2331.64 152.27,2377.81 396.87,2377.81 v1(554.43,2220.25) ; U1.1@745.85,723.15 U1.1@762.2,739.5 762.2,709.5 U1.1@763.2,708.5
  Top Layer w20: 149.5,266.27 251.47,266.27 ?.0@265.2,280.01 ; 276.91,164.49 ?.0@276.91,268.31 ; 276.91,378.6 276.91,291.71 ?.0@265.2,280.01 ; 365.11,265.52 279.7,265.52 ?.0@276.91,268.31 ; P7.0@586.7,265.62 P7.0@586.7,270.41 ; 598.4,424.89 586.7,413.18 586.7,325.31 ; 606.69,2392.12 699.59,2392.12 ?.0@712.29,2379.42 ; P7.A1@629.61,304.01 629.61,323.5 627.8,325.31 586.7,325.31 ; P7.A1@629.81,303.81 629.81,281.17 628,279.36 595.65,279.36 P7.0@586.7,270.41 ; 722.42,2285.94 722.42,2369.29 ?.0@712.29,2379.42 ; 724.16,2477.12 724.16,2391.3 ?.0@712.29,2379.42 ; 732.17,1727.03 746.67,1712.53 971.06,1712.53 v3(1023.16,1660.43) ; 822.38,1858.28 1123.61,1858.28 1153.64,1888.31 v3(1153.64,1947.78) ; P7.B1@883.54,304.01 883.54,325.22 885.36,327.03 941.88,327.03 ; v3(1076.04,2447.9) 1077.57,2446.37 1094.13,2446.37 1094.52,2445.98 1144.93,2496.39 S2.3@1261.61,2496.39 ; v3(1128.82,2099.04) v1@1128.82,2287.39 ; 1264.53,3065.65 P9.B1@1349.63,3065.65 ; P9.B1@1349.63,3067.24 1349.63,3089.88 1347.82,3091.69 1315.47,3091.69 1306.52,3100.64 P9.0@1306.52,3105.43 P9.0@1306.52,3270 P9.0@1646.68,3270 ; Y1.2@1369.84,2044.51 1381.5,2032.86 1393.31,2032.86 1456.46,1969.71 Y1.4@1460.4,1969.71 ; R10.2@1548.86,2845.58 R11.2@1612.62,2845.58 1665.34,2845.58 1698.72,2878.96 1698.72,3145.58 ; P9.A1@1603.57,3067.24 1603.57,3089.88 1605.38,3091.69 1637.73,3091.69 1646.68,3100.64 P9.0@1646.68,3105.43 ; P9.A1@1606.29,3056.24 P9.A1@1606.52,3056.01 ; v3(1761.01,2295.04) 1762.54,2293.5 C11.1@1762.54,2170.72 ; v3(1844.03,1822.25) 1844.03,1806.75 C9.2@1847.54,1803.24 ; v1@1955.4,1863.56 2269.12,1863.56 2291.9,1886.33 2305.02,1886.33 v3(2306.55,1887.86) ; 1975.29,330.03 1976.86,328.46 2028.03,328.46 2029.84,326.65 P6.A1@2029.84,304.01 ; R18.1@2027.31,507.88 R25.1@2095.87,507.88 2104.18,516.18 2119.56,516.18 2181.13,577.75 2240.91,577.75 ; 2077.14,2364.49 2179.79,2364.49 ?.0@2194.72,2379.42 ; v3(2136.07,2841.11) 2136.07,2843.27 2146.15,2853.35 R21.1@2146.15,2897 ; 2179.79,2476.26 2179.79,2394.35 ?.0@2194.72,2379.42 ; 2209.67,2265.49 2209.67,2364.47 ?.0@2208.05,2366.09 ; P6.B1@2283.78,304.01 2283.78,321.84 2285.59,323.65 2336.4,323.65 ; 2298.29,2366.09 ?.0@2208.05,2366.09 ; 2365.14,859.65 v1@2511.27,859.65 ; v1(2511.27,849.91) 2512.35,849.91 2520.45,841.81 2649.67,841.81 2703.67,787.81 J4.32@2706.69,787.81 ; 2532.85,268.94 ?.0@2647.67,268.94 ; 2643.72,183.38 2643.72,265 ?.0@2647.67,268.94 ; 2756.11,268.94 2669.8,268.94 ?.0@2658.74,280.01 ?.0@2647.67,268.94 ; ?.0@265.2,280.01 ?.0@276.91,268.31 ; P7.0@586.7,270.41 586.7,325.31 ; ?.0@2194.72,2379.42 ?.0@2208.05,2366.09
  Top Layer w30: v3(142.53,1310.07) 204.43,1310.07 J3.21@206.69,1307.81 ; J5.6@506.69,1407.81 J3.20@306.69,1407.81 J3.19@206.69,1407.81 J3.21@206.69,1307.81 ; 704.84,552.42 R8.1@704.84,495.16 R9.1@764.87,495.16 C13.2@848.22,495.16 ; 705.21,760.77 747.2,760.77 762.2,745.77 U1.1@762.2,739.5 U1.1@763.2,740.5 ; 709.41,723.15 U1.1@745.85,723.15 ; U1.1@763.2,692.79 763.2,708.5 U1.1@763.2,740.5 ; U1.1@763.2,744.5 U1.1@763.2,740.5 ; v1(772.06,822) 772.06,749.36 U1.1@763.2,740.5 ; v3@834.19,1471.39 707.51,1471.39 545.24,1309.12 508,1309.12 J5.7@506.69,1307.81 J3.22@306.69,1307.81 J3.21@206.69,1307.81 ; v1@848.22,460.1 C13.2@848.22,495.16 ; C13.2@848.22,500.1 C13.2@848.22,495.16 ; v1@958.58,460.1 C12.2@958.58,495.16 ; C12.2@958.58,500.1 C12.2@958.58,495.16 ; v3@960.52,1405 986.52,1379 C1.1@1058.52,1379 1055.52,1376 1055.52,1346.66 v3(1053.23,1344.37) ; v3(1023.16,1660.43) C4.1@1057.95,1660.43 ; 1034.1,495.16 C12.2@958.58,495.16 ; C6.2@1559.01,2124.42 C5.2@1640.33,2124.42 ; v3(1575.7,1144.51) 1575.7,1151.53 1578.08,1153.91 1604.4,1153.91 R22.1@1607.71,1157.22 1608.69,1157.22 1612,1153.91 v1(1612,1116.3) ; 1703.63,1265.46 1718.26,1265.46 1735.84,1247.89 1735.84,1221.16 1739.15,1217.85 C7.1@1740.13,1217.85 ; v2(1829.27,231.96) 1829.27,401.54 1878.71,450.98 v2(1968.65,450.98) ; v1(2338.12,1957.65) 2346.69,1966.22 2413.22,1966.22 2434.01,1987.01 2605.89,1987.01 J4.7@2606.69,1987.81 ; J4.32@2706.69,787.81 2747.41,787.81 ; C13.2@848.22,495.16 C12.2@958.58,495.16
  Bottom Layer w10: v2(384.41,1307.12) 384.41,1301.71 393.84,1292.28 v1(393.84,1250.38) ; v1@937.64,2443.42 v1(944.67,2450.45) ; v1@947.99,2443.42 v3@1076.04,2443.42 ; v3@960.52,1405 1006.55,1451.03 1006.55,1467.51 1121.59,1582.55 1222.2,1582.55 1278.01,1526.74 1284.14,1526.74 1285.46,1525.42 1294.21,1525.42 1295.53,1526.74 v1@1304.53,1526.74
  Bottom Layer w20: 412.99,2214.1 548.28,2214.1 v1(554.43,2220.25) ; 852.8,2214.1 968.77,2214.1 1076.04,2321.37 ; v3@1076.04,2443.42 v3(1076.04,2447.9) ; v3(1128.82,2099.04) 1128.82,1998.98 1153.64,1974.16 v3(1153.64,1947.78) ; v1(1694.68,2072.46) 1748.79,2018.35 v3(1748.79,1922.9) 1800.69,1922.9 1844.03,1879.56 v3(1844.03,1822.25) ; v3(1761.01,2295.04) 1761.01,2345.79 S1.3@1911.61,2496.39 1916.91,2501.69 2085.15,2501.69 2136.07,2552.61 v3(2136.07,2841.11) ; v1(1834.56,1136.25) 1843.57,1145.27 2006.69,1145.27 2007.42,1146 2019.43,1146 2020.16,1145.27 2020.9,1146 2023.76,1146 2024.49,1145.27 v1@2304.21,1145.27 ; 2107.09,2395 2179.14,2395 ?.0@2194.72,2379.42 ; 2205.3,2282.95 2205.3,2368.84 ?.0@2194.72,2379.42 ; 2293.97,2393.39 2208.68,2393.39 ?.0@2194.72,2379.42 ; v3(2306.55,1887.86) 2306.55,1900.98 2369.68,1964.11 2403,1964.11 J7.4@2406.69,1967.81 2417.52,1967.81 2437.52,1987.81 J4.7@2606.69,1987.81 ; 2549.26,295.11 2643.63,295.11 ?.0@2648.9,289.85 ; 2623.57,368.97 2648.9,343.64 ?.0@2648.9,289.85 ; 2672.81,176.21 ?.0@2672.81,265.93 ; 2765.8,265.88 2672.86,265.88 ?.0@2672.81,265.93 ; ?.0@2648.9,289.85 ?.0@2658.74,280.01 ?.0@2672.81,265.93
  Bottom Layer w30: v3(114.92,1130.22) 114.92,1282.47 v3(142.53,1310.07) ; 774.73,532.84 v1@787.91,519.67 ; v3@960.52,1405 v3(952.52,1405) 911.61,1405 859.51,1457.1 859.51,1524.79 v1(995.15,1660.43) v3(1023.16,1660.43) ; v3(1053.23,1344.37) 1030.99,1322.13 1030.99,1210.49 v2(1058.93,1182.55) ; v2(1829.27,231.96) 1863.12,265.82 P6.0@1986.73,265.82 ; 1996.62,518.39 1968.65,490.43 v2(1968.65,450.98) 2002.59,450.98 2070,518.39
  other v1: 1961.1,30.06 999.29,32.79 455.2,37.73 1917.45,37.63 1997.29,41.33 813.83,49.24 733.28,53.07 2057.74,59.72 2143.03,60.84 2445.64,67.09 2607.94,67.09 2705.32,67.09 2224.9,69.05 2532.52,69 303.78,71.58 99.87,75.06 180.34,81.2 2141.62,90.64 2782.19,101.77 2834.2,109.09 422.39,111.37 45.68,135.71 2470.36,160.93 1445,204.48 1507.85,204.48 1365.51,240.28 1468.47,246.88 1828.12,285.74 2404.12,310.87 2475.83,338.75 1460.86,362.01 494.49,380.35 1511.61,396.93 28.29,399.64 553.17,418.35 1352.16,417.58 421.07,421.14 224.25,437.46 307.87,437.46 368.04,437.46 2271.06,448.63 1393.55,452.67 810.09,454.38 587.7,455.26 955.45,455.05 909.58,456.1 839.84,456.74 874.99,457.42 1113.43,466.86 1574.76,481.25 1326.94,501.29 612.68,508.91 1400.96,508.91 791.82,510.69 1963.32,515 28.29,516.91 700.73,532.23 2819.32,539.68 2039.94,550.04 1013.4,554.08 1452.96,555.57 1326.68,565.98 1664.92,572.9 700.73,574.04 2254,575.27 1260.73,596.21 1510.28,596.9 2820.76,629.16 28.29,634.18 1831.11,646.52 2232.13,649.12 1049.59,662.58 1800.37,681.26 1954.7,702.55 1175.71,705.48 1090.82,705.99 1771.1,727.83 1049.59,730.36 2009.25,730.49 1935.88,737.06 1827.07,741.62 2039.2,742.11 28.29,751.46 577.2,751.79 1978.15,752.58 430.28,756.84 368.17,761.89 614.57,764.92 1049.59,774.53 1154.03,776.82 1952.04,779.72 1792.39,781.05 2001.01,784.23 1086.25,813.37 2112.21,819.82 1952.68,821.06 822.48,824.93 2246.97,843.5 588.68,844.28 2475.34,852.78 2067.83,860.69 1916.8,862.29 2222.39,861.93 614.17,865.91 2046.43,888.47 999.43,891.05 1885.5,892.04 997.91,926.08 2023.09,925.68 1660.2,932.15 1756.27,933.15 1849.84,937.51 2177.4,942.01 1800.81,942.85 2480.65,953.22 2523.54,954.46 2019.91,956.07 2149.07,956.4 1635.81,956.54 2113.55,957.3 1748.21,966.45 1198.44,987.83 1169.23,991.48 1724.14,994.56 1426.56,1003.9 1459.12,1018.12 1382.99,1021.79 1201.18,1022.52 1492.97,1024.25 1692.05,1023.98 1169.23,1028.91 1556.03,1033.01 1842.06,1079.25 839.23,1094.4 1799.97,1095.16 958.82,1100 1770.35,1110.4 821.38,1116.13 1650.19,1116.04 1686.33,1116.04 1179.2,1118.71 2026.84,1129.84 1128.01,1131.12 929.9,1133.15 2306.04,1136.29 1081.48,1140.43 1440.4,1141.88 2205.93,1144.49 2273.32,1145.72 2238.4,1149.83 903.1,1154.66 2014.27,1155.9 1461.66,1158.59 2304.21,1161.18 1149.72,1162.46 1102.82,1179.35 879.83,1191.34 1019.64,1201.38 1266.48,1218.74 1221.46,1222.58 138.8,1241.53 1288.31,1253.72 1186.59,1256.28 1221.75,1256.9 1254.86,1256.9 1051.45,1279.84 1133.06,1291.49 1092.06,1299.32 1034.44,1307.62 2818.25,1351.45 355.39,1358.3 391.67,1364.88 886.54,1410.04 856.03,1413.21 979.73,1418.06 841.2,1442.4 882.69,1442.97 137.39,1453.5 2817.82,1455.19 1398.23,1521.17 1361.23,1522.07 1295.53,1522.74 1326.32,1522.9 135.03,1562.63 2819.55,1630.69 1053.86,1684.97 1017.08,1693.28 1359.17,1696.93 1289.98,1699.56 1323.07,1699.94 1068.25,1714.27 1036.45,1720.05 2818.25,1733.56 1944.54,1865.86 1916.59,1869.5 897.72,1898.38 869.88,1898.77 927.85,1901.05 1791.54,1909.92 1381.42,1912.66 1346.07,1919.49 1221.37,1922.15 1188.12,1952.17 1747.59,1959.26 2299.94,1983.75 2338.55,1985.11 1168.72,1998.82 522.07,2002.36 1750.15,2003.31 1420.93,2015.73 463.78,2023.17 530.56,2042.32 1721.74,2045.4 1192.73,2048.71 1507.28,2072.47 1215.83,2078.73 1599.55,2093.11 1495.41,2110.45 1363.84,2113.23 1599.67,2124.42 1158.2,2126.46 793.67,2144.4 826.18,2143.62 757.25,2144.66 1177.67,2152.04 533.68,2163.51 561.1,2184.16 503.04,2193.51 1877.22,2194.12 472.07,2198.03 952.6,2213.92 2481.54,2220.94 1029.21,2223.53 1873.41,2228.4 2527.49,2244.92 944.44,2253.35 1029.93,2259.39 1757.42,2263.32 1858.17,2262.69 481.61,2269.44 520.94,2270.37 445,2273.35 1136.27,2287.39 1173.21,2288.91 420.2,2293.3 602.37,2312.16 463.86,2316.47 1165.93,2319.08 570.58,2333.72 1120.16,2335.72 435.45,2349.71 1368.2,2355.23 549.02,2357.43 1192.97,2356.52 1154.49,2361.72 1428.67,2364.88 1519.37,2364.88 1819.96,2366.29 1765.96,2378.63 529.61,2389.23 2327.58,2398.31 2607.28,2397.92 2515.6,2398.71 2441.56,2400.27 2555.95,2409.76 503.2,2421.03 148.39,2434.82 199.27,2435.34 243.78,2436.49 1972.08,2452.02 1396.95,2453.36 1455.74,2452.9 1547.4,2452.9 1802.6,2453.28 2033.81,2457.5 2064.64,2468.19 1516.14,2469.02 2047.76,2498.47 2084.85,2506.24 896.76,2514.02 2119.61,2587.69 2408.93,2629.76 2263.17,2630.82 2807.05,2631.58 2621.2,2633.3 2124.07,2633.61 1956.34,2636.8 2004.17,2647.64 2303.32,2660.62 2049.45,2671.24 2129.17,2678.89 1986.95,2683.36 1656.44,2692.26 1099.85,2696.62 1556.99,2697.5 2320.2,2699.23 946.31,2700.11 1454.04,2701.86 54.27,2704.06 1192.33,2704.48 1299.63,2707.09 1364.19,2708.84 2029.68,2710.14 730.43,2711.65 2274.34,2728.56 1664.42,2735.45 702.96,2735.68 1499.33,2737.19 894.84,2740.24 947.18,2746.35 1285.51,2746.42 1420.88,2749.63 1327.32,2751.28 1135.6,2754.07 1236.58,2754.07 1385.16,2754.68 1186.81,2758.9 1082.44,2760.35 677.65,2765.29 641.6,2767.43 1457,2773.49 497.65,2776.5 465.98,2788.43 1052,2788.38 895.71,2789.1 1494.04,2790.65 530.7,2798.53 2260.33,2803.26 874.78,2813.52 493.98,2828.37 1020.12,2828.96 54.27,2845.58 992.57,2850.71 2303.77,2860.03 2863.25,2865.2 529.78,2869.68 454.97,2871.06 1088.73,2875.83 1337.78,2881.43 1368.89,2883.2 1306.66,2883.65 963.58,2884.53 491.69,2887.12 2368.69,2891.63 1062.15,2901.92 2267.8,2902.24 531.16,2913.74 855.94,2920.36 1032.68,2932.36 1671.37,2931.82 1354.67,2937 2858.22,2937.24 1292.43,2938.77 694.97,2940.74 1722.64,2942.25 651.04,2942.85 838.37,2943.91 1006.1,2957.49 2348.85,2959.16 1690.29,2966.28 1287.1,2986.34 54.27,2987.09 2275.28,2991.88 2346.05,3006.47 1280.87,3025.46 2084.05,3061.25 1777.1,3068.23 2326.39,3074.59 1816.72,3079.6 2819.81,3079.86 1741.01,3082.74 2691.55,3093.16 521.56,3104.39 2136.18,3108.85 2055.72,3114.52 1700.66,3119.12 2736.69,3127.03 54.27,3128.6 511.87,3134.7 2832.36,3150.23 692.93,3150.87 568.33,3151.7 1993.4,3154.18 531.08,3162.87 2198.51,3168.91 2139.24,3169.78 2020.44,3190.8 2825.77,3201.16 2868.94,3202.73 1434.05,3215.11 1826.34,3224.14 2172,3229.25 2804.31,3231.15 2879.3,3236.22 1717.23,3236.68 1543.48,3252.16 1389.38,3258.79 2824.59,3264.84 2858.28,3264.84 1781.03,3266.72 1468.2,3267.92 2222.02,3268.05 1827.32,3288.69 1741.01,3294.18 2247.02,3299.96 2174.68,3316.95 229.28,3319.52 281.25,3319.52 333.22,3319.52 385.19,3319.52 437.16,3319.52 489.13,3319.52 541.1,3319.52 593.07,3319.52 645.04,3319.52 697.01,3319.52 748.98,3319.52 800.95,3319.52 852.92,3319.52 904.89,3319.52 956.86,3319.52 1008.83,3319.52 1060.8,3319.52 1112.77,3319.52 1164.74,3319.52 2276.34,3338.76
  other v3: 834.19,1476.39
IAP: R14.1 S5.1 U3.10 | length 977.8
  Top Layer w10: U3.10@1136.27,3090.66 1136.65,3091.04 1159.48,3091.04 1167.43,3098.99 1167.43,3111.52 v2(1171.26,3115.34) ; R14.1@1890.52,3067.51 1890.52,3113.24 1906.7,3129.42 S5.1@1906.7,3217.42
  Bottom Layer w10: v2(1171.26,3115.34) 1231.16,3175.24 1825.82,3175.24 v2(1888.9,3112.16)
KEY: J3.15 pad.@954.53,2320.31 R24.1 S2.1 | length 1328.1
  Top Layer w8: v2(949.52,2109) 985.78,2109 990.58,2104.2 1001.77,2115.39 S2.1@1001.77,2319.23
  Bottom Layer w8: J3.15@206.69,1607.81 259.3,1660.41 529.83,1660.41 636.57,1767.15 636.57,1920.48 696.75,1980.65 864.1,1980.65 949.52,2066.07 v2(949.52,2109)
LED1: J3.11 LED1.2 | length 2299.9
  Top Layer w8: v2(1407.43,2277.27) 1445.73,2238.97 1610.75,2238.97 1781.88,2067.84 2093.68,2067.84 LED1.2@2130.52,2031
  Bottom Layer w8: J3.11@206.69,1807.81 257.23,1858.34 548.2,1858.34 574.04,1884.18 574.04,1975.49 632.76,2034.21 774.91,2034.21 818.59,2034.21 851.81,2067.42 851.81,2111.11 917.86,2177.16 1079.87,2177.16 1160.32,2257.6 1386.45,2257.6 v2@1407.43,2278.58
LED2: J3.13 LED2.2 | length 2560.7
  Top Layer w8: v2(1470.69,2277.93) 1471.3,2277.31 1600.24,2277.31 1791.7,2085.86 2145.99,2085.86 2166.04,2065.81 2166.04,1946.51 2145.81,1926.29 2144.83,1926.29 2130.52,1911.98 LED2.2@2130.52,1911
  Bottom Layer w8: J3.13@206.69,1707.81 254.48,1755.59 528.77,1755.59 593.68,1820.51 593.68,1952.86 656.1,2015.27 831,2015.27 866.14,2050.42 866.14,2100.54 925.86,2160.26 1092.51,2160.26 1168.44,2236.18 1429.56,2236.18 1470.69,2277.31 v2(1470.69,2277.93)
LED_CON: R13.1 U3.12 | length 1371.2
  Top Layer w10: U3.12@900.27,3065.06 v2(960.78,3065.06) ; v2(1995.85,2832.88) 2078.26,2832.88 2146.15,2764.98 R13.1@2146.15,2764
  Bottom Layer w10: v2(960.78,3065.06) 1192.96,2832.88 v2(1995.85,2832.88)
NetC13_1: C13.1 S3.1 U1.2 | length 6745.9
  Top Layer w25: U1.2@848.2,739.5 U1.2@848.21,694.12 ; v2(1002.87,270.79) 1002.01,269.93 v2(1002.01,236.8) 1002.01,113.37 1053.35,62.02 1860.43,62.02 1951.4,152.99 2402.34,152.99 2429.48,125.85 2753.04,125.85 2874.86,247.66 2874.86,2335.06 2696,2513.93 2247.03,2513.92 2209.82,2551.13 2209.82,3007.44 2369.78,3167.4 2528.67,3167.4 2556.22,3194.95 S3.1@2556.22,3246 ; v2@848.21,648.75 v2@877.15,648.75 ; v2@848.21,648.75 U1.2@848.21,694.12 ; v2@848.21,648.75 C13.1@848.22,610.1 853.22,610.1 870.72,627.6 870.72,632.6 876.62,638.5 876.62,648.21 v2@877.15,648.75 ; U1.2@848.21,694.12 863.58,694.12 865.7,692 865.7,662.39 877.57,650.52 v2(877.57,649.17) v2@877.15,648.75
  Bottom Layer w25: v2(842.21,648.75) 842.42,648.96 877.36,648.96 v2(877.57,649.17) 878.53,648.21 878.53,618.07 ; v2@848.21,648.75 848.21,648.39 878.53,618.07 ; v2(1002.01,236.8) 1002.01,494.6 878.53,618.07